# Altium PCB BBiQ_PCB.PcbDoc (part 2 of 2)
Units mil, origin at the board's own origin, x right, y up, seen from the top; angles counter-clockwise.
Board outline 2950 x 4745 mil, 2 copper layers (Top Layer, Bottom Layer); 173 components, 113 nets, 521 pads, 256 vias.
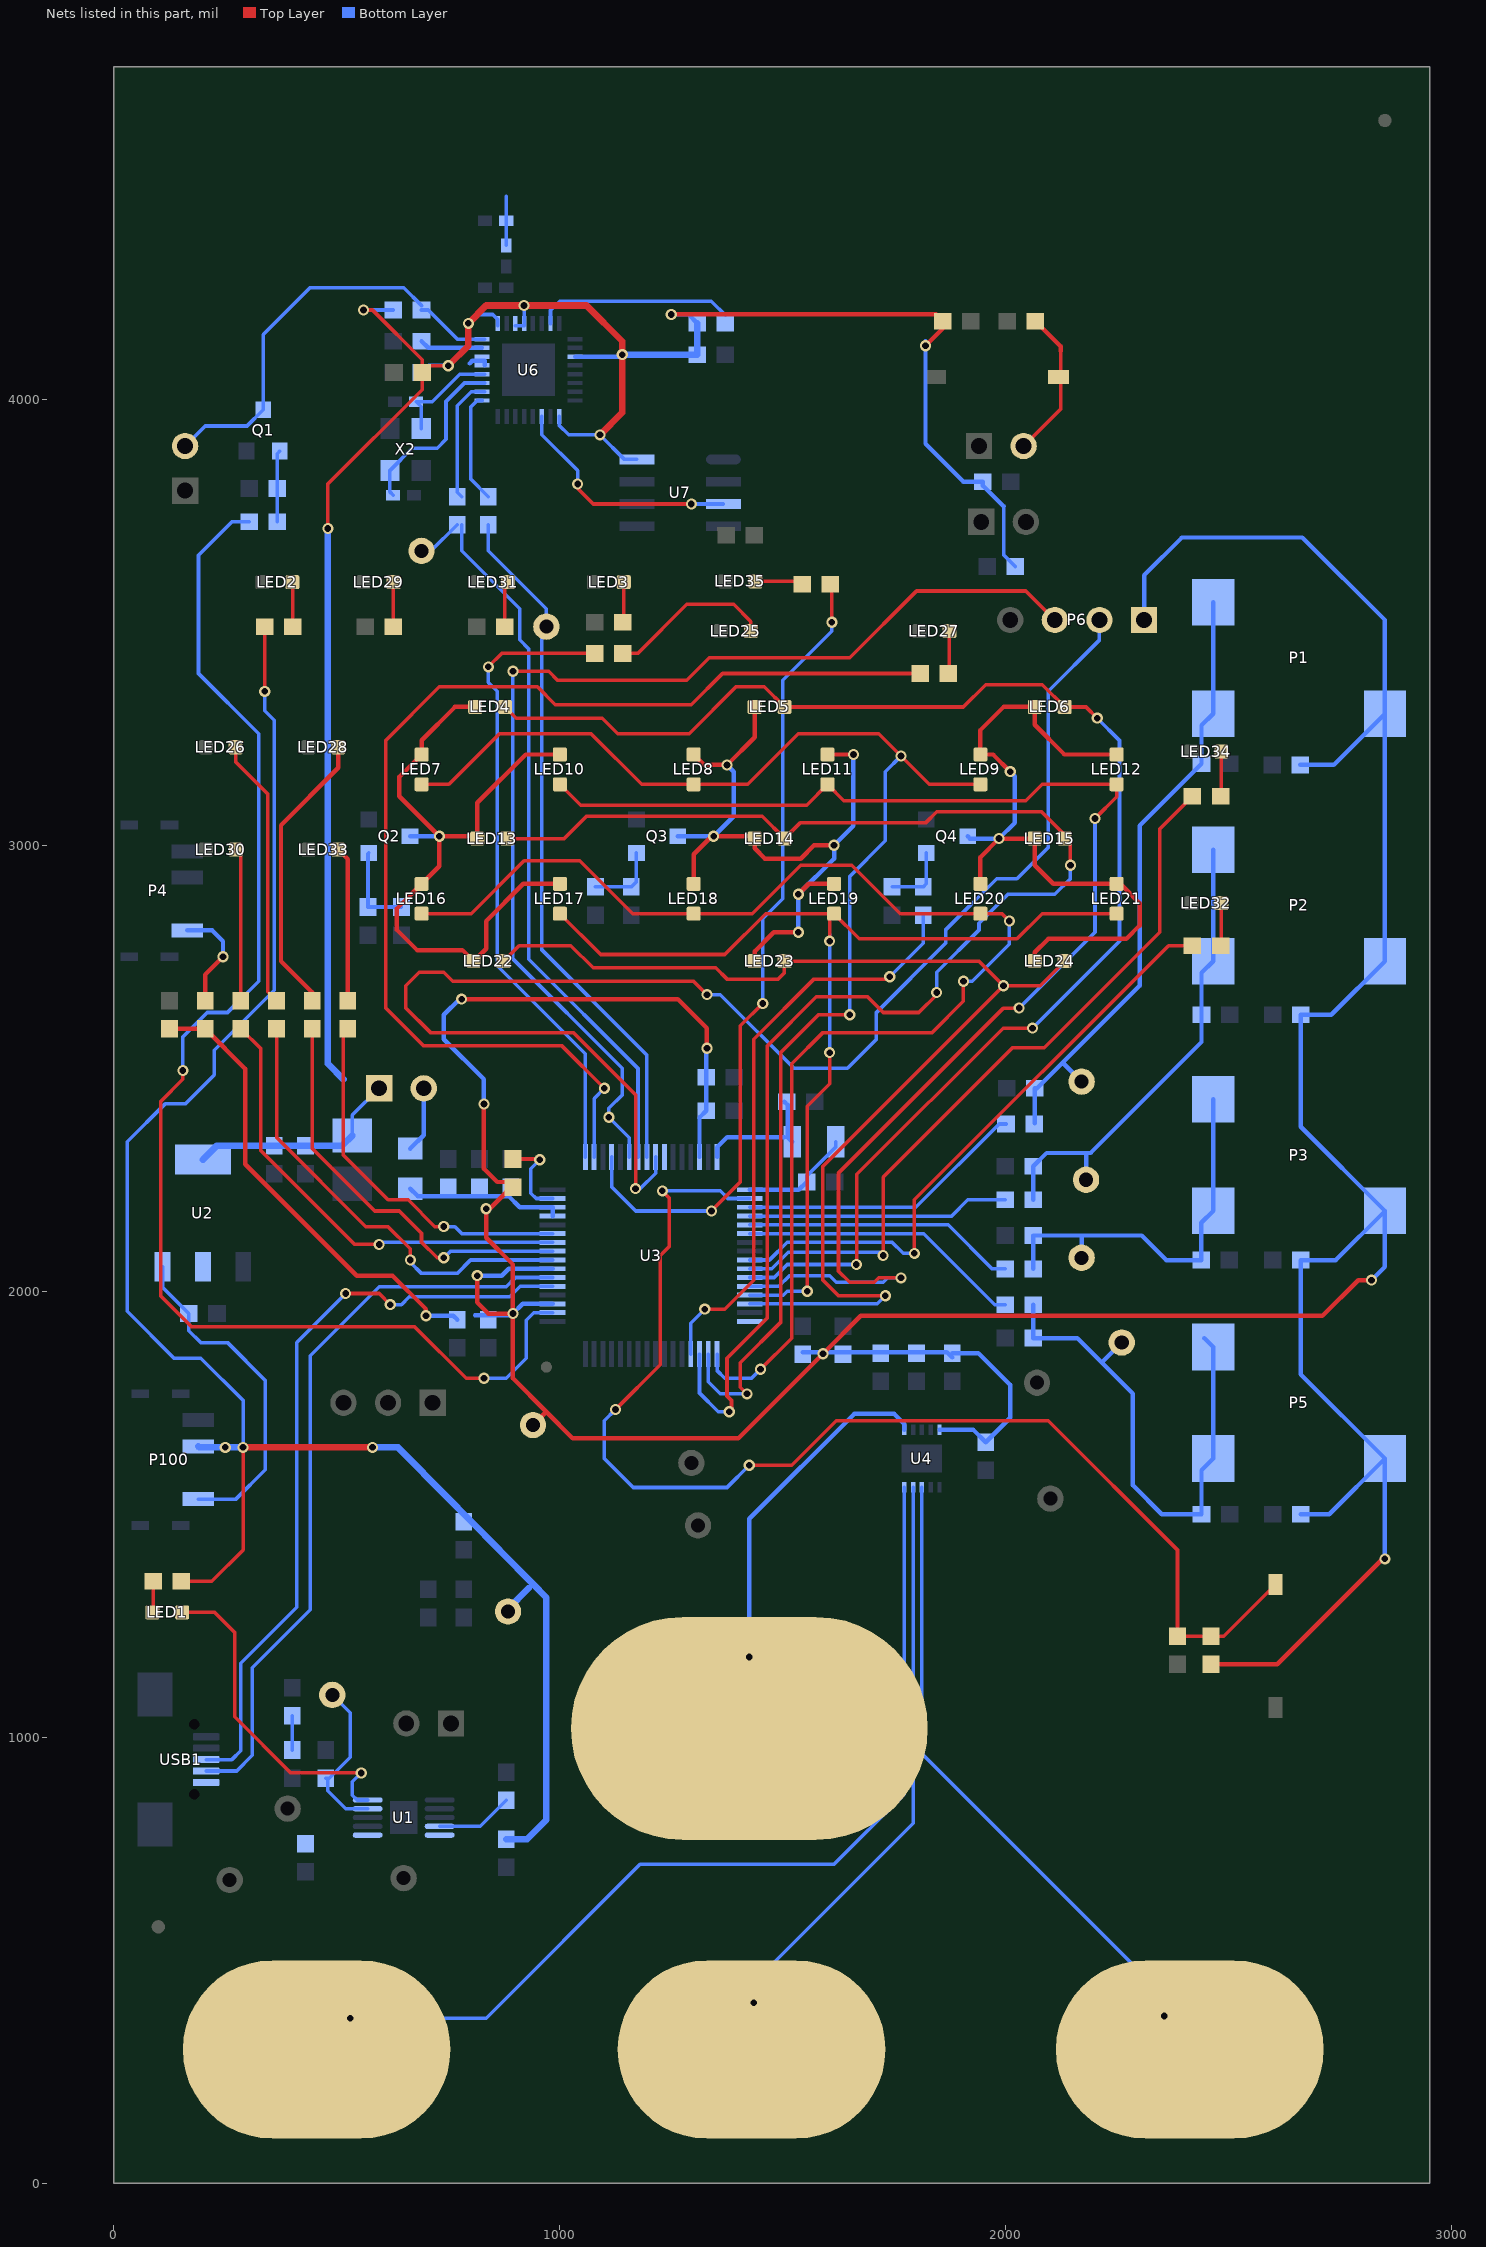
[diagram p2: the nets of this part, all layers, seen from the top]

## Via types
v1: diameter 25, hole 15, Top Layer to Bottom Layer, 244 vias
v2: diameter 23.62, hole 21.65, Top Layer to Bottom Layer, 8 vias
v3: diameter 35.43, hole 35.43, Top Layer to Bottom Layer, 4 vias

## Nets (pads, with @x,y where several pads share a name; then routed paths per layer and width w, separated by ;. In a path a pad name is that pad's centre, name@x,y a point inside that pad or via, vN(x,y) a via of type N, cw(c..) or ccw(c..) an arc to the next point about the centre after c; other vN are vias at no path point) (continued)
LED_CTRL_3: R34.1 U3.52 | length 1323.5
  Top Layer w8: v1(1325,1960) 1370,1960 1435,2025 1435,2565 1570,2700 1735,2700 v1(1740,2705)
  Bottom Layer w8: U3.52@1293.58,1859 1293.58,1928.58 v1(1325,1960) ; v1(1740,2705) 1815,2780 R34.1@1815,2843.5
LED_DEG: R45.2 U3.41 | length 1375.5
  Top Layer w8: v1(1795,2085) 1795,2205 2365,2775 R45.2@2418.5,2775
  Bottom Layer w8: U3.41@1426,2070.16 1470.16,2070.16 1510,2110 1745,2110 1770,2085 v1(1795,2085)
LED_DONE: R48.2 U3.20 | length 1831.5
  Top Layer w8: v1(1340,2180) 1405,2245 1405,2595 v1(1455,2645) ; R48.2@1606.5,3585 1610,3581.5 v1(1610,3500)
  Bottom Layer w8: U3.20@1116.42,2301 1116.42,2233.58 1170,2180 v1(1340,2180) ; v1(1455,2645) 1455,2835 1500,2880 1500,3370 1610,3480 v1(1610,3500)
LED_FAHR: R47.2 U3.42 | length 1676.3
  Top Layer w8: v1(1725,2080) 1725,2256 2015,2546 2086,2546 2345,2805 2345,3036.5 R47.2@2418.5,3110
  Bottom Layer w8: U3.42@1426,2050.47 1475.47,2050.47 1512.5,2087.5 1717.5,2087.5 v1(1725,2080)
LED_PROBE_1: R39.2 U3.8 | length 1018.9
  Top Layer w8: R39.2@365,2588.5 365,2345 565,2145 615,2145 665,2095 v1(665,2070)
  Bottom Layer w8: v1(665,2070) 665,2065 690,2040 769.84,2040 800,2070.16 U3.8@984,2070.16
LED_PROBE_2: R41.2 U3.9 | length 926.9
  Top Layer w8: R41.2@445,2588.5 445,2320 585,2180 640,2180 690,2130 690,2110 725,2075 v1(740,2075)
  Bottom Layer w8: v1(740,2075) 754.84,2089.84 U3.9@984,2089.84
LED_PROBE_3: R43.2 U3.10 | length 1035
  Top Layer w8: R43.2@285,2588.5 330,2543.5 330,2315 540,2105 v1(595,2105)
  Bottom Layer w8: v1(595,2105) 599.53,2109.53 U3.10@984,2109.53
LED_PROBE_4: R46.2 U3.11 | length 829.5
  Top Layer w8: R46.2@525,2588.5 515,2578.5 515,2305 615,2205 660,2205 720,2145 v1(740,2145)
  Bottom Layer w8: v1(740,2145) 765,2145 780.79,2129.21 U3.11@984,2129.21
LED_SEG_1: LED4.1 LED5.1 LED6.1 U3.43 | length 3246.4
  Top Layer w8: LED4.1@877.24,3310 902.24,3285 1095,3285 1130,3250 1290,3250 1395,3355 1458.78,3355 LED5.1@1503.78,3310 1905,3310 1955,3360 2081.93,3360 LED6.1@2131.93,3310 2180,3310 v1(2205,3285) ; v1(1665,2060) 1666,2061 1666,2262 1994,2590 v1(2060,2590)
  Bottom Layer w8: U3.43@1426,2030.79 1480.79,2030.79 1510,2060 v1(1665,2060) ; v1(2060,2590) 2255,2785 2255,3235 v1(2205,3285)
LED_SEG_2: LED10.1 LED11.1 LED12.1 U3.44 | length 3201
  Top Layer w8: LED10.1@1000.32,3136.54 1046.85,3090 1553.78,3090 LED11.1@1600.32,3136.54 1636.85,3100 2045,3100 2081.54,3136.54 LED12.1@2248.46,3136.54 2248.46,3108.46 v1(2200,3060) ; v1(1765,2030) 1715,2030 1705,2020 1650,2020 1625,2045 1625,2265 1995,2635 v1(2030,2635)
  Bottom Layer w8: U3.44@1426,2011.1 1491.1,2011.1 1515,2035 1605,2035 1620,2020 1725,2020 1735,2030 v1(1765,2030) ; v1(2030,2635) 2200,2805 v1(2200,3060)
LED_SEG_3: LED17.1 LED19.1 LED21.1 U3.45 | length 2389.8
  Top Layer w8: LED17.1@1000.32,2846.54 1091.85,2755 1370,2755 1461.54,2846.54 LED19.1@1615,2846.54 ; v1(1555,2000) 1555,2415 1605,2465 v1(1605,2535) ; v1(1605,2785) 1605,2836.54 LED19.1@1615,2846.54 ; LED21.1@2248.46,2846.54 2081.54,2846.54 2025,2790 1671.54,2790 LED19.1@1615,2846.54
  Bottom Layer w8: U3.45@1426,1991.42 1501.42,1991.42 1510,2000 v1(1555,2000) ; v1(1605,2535) v1(1605,2785) 1605,2800
LED_SEG_4: LED22.1 LED23.1 LED24.1 U3.46 | length 2675
  Top Layer w8: LED22.1@873.78,2740 908.78,2775 1025,2775 1075,2725 1350,2725 1375,2700 1490,2700 1503.78,2713.78 LED23.1@1503.78,2740 1940,2740 v1(1995,2685) ; v1(1730,1990) 1625,1990 1590,2025 1590,2280 v1(1995,2685) ; LED24.1@2131.93,2740 2076.93,2685 v1(1995,2685)
  Bottom Layer w8: U3.46@1426,1971.73 1711.73,1971.73 v1(1730,1990)
LED_SEG_5: LED16.1 LED18.1 LED20.1 U3.49 | length 3053.5
  Top Layer w8: LED16.1@690.32,2846.54 801.54,2846.54 920,2965 1045,2965 1163.46,2846.54 LED18.1@1300.32,2846.54 1431.54,2846.54 1540,2955 1655,2955 1763.46,2846.54 LED20.1@1943.15,2846.54 1991.54,2846.54 v1(2008.07,2830) ; v1(1450,1825) 1520,1895 1520,2510 1590,2580 1835,2580 1905,2650 v1(1905,2695)
  Bottom Layer w8: U3.49@1352.64,1859 1352.64,1822.36 1370,1805 1430,1805 v1(1450,1825) ; v1(1905,2695) 1925,2695 2008.07,2778.07 v1(2008.07,2830)
LED_SEG_6: LED7.1 LED8.1 LED9.1 U3.50 | length 3227.4
  Top Layer w8: LED7.1@690.32,3136.54 751.54,3136.54 865,3250 1070,3250 1183.46,3136.54 LED8.1@1300.32,3136.54 1421.54,3136.54 1535,3250 1715,3250 1828.46,3136.54 LED9.1@1943.15,3136.54 ; v1(1420,1770) 1405,1785 1405,1840 1495,1930 1495,2535 1580,2620 v1(1650,2620)
  Bottom Layer w8: U3.50@1332.95,1859 1332.95,1797.05 1360,1770 v1(1420,1770) ; v1(1650,2620) 1650,2930 1730,3010 1730,3165 v1(1765,3200)
LED_SEG_7: LED13.1 LED14.1 LED15.1 U3.51 | length 3373.4
  Top Layer w8: LED13.1@881.93,3015 1010,3015 1060,3065 1453.78,3065 LED14.1@1503.78,3015 1538.78,3050 1820,3050 1845,3075 2080,3075 2131.93,3023.07 LED15.1@2131.93,3015 2145,3001.93 v1(2145,2955) ; v1(1380,1730) 1385,1735 1385,1755 1375,1765 1375,1850 1465,1940 1465,2550 1575,2660 1690,2660 1725,2625 1805,2625 v1@1845,2665
  Bottom Layer w8: U3.51@1313.27,1859 1313.27,1771.73 1355,1730 v1(1380,1730) ; v1(1845,2670) 1845,2715 1940,2810 1940,2825 2005,2890 2110,2890 2145,2925 v1(2145,2955)
LED_TEMP_CURR: R38.2 U3.17 | length 1440
  Top Layer w8: v1(840,3400) 870,3430 R38.2@1078.5,3430
  Bottom Layer w8: v1(840,3400) 840,3365 860,3345 860,2730 1057.36,2532.64 U3.17@1057.36,2301
LED_TEMP_TAGT: R40.2 U3.18 | length 2621.8
  Top Layer w8: v1(1100,2455) 1005,2550 695,2550 610,2635 610,3235 730,3355 950,3355 990,3315 1295,3315 1365,3385 R40.2@1808.5,3385
  Bottom Layer w8: U3.18@1077.05,2301 1077.05,2432.05 v1(1100,2455)
MINUS: K1.1 U4.10 | length 2139.1
  Bottom Layer w8: v1(530,370) 835,370 1180,715 1615,715 1772.64,872.64 U4.10@1772.64,1560.94
MUX: K2.1 U4.1 | length 777.7
  Bottom Layer w10: v1(1425,1180) 1425,1490 1660,1725 1750,1725 1772.64,1702.36 U4.1@1772.64,1689.06
NetC6_1: C6.1 P100.1 U2.3 | length 763.5
  Bottom Layer w8: U2.3@109.45,2054.92 109.45,2009.06 C6.1@168.5,1950 168.5,1911.5 195,1885 255,1885 340,1800 340,1600 274.06,1534.06 P100.1@189.37,1534.06
NetC10_1: C10.1 J8.0 P1.2 P1.3 R9.1 R10.2 | length 1393.7
  Bottom Layer w10: R9.1@2065,2376.5 C10.1@2065,2455 2070,2455 2300,2685 2300,3043.9 R10.2@2438.84,3182.73 2438.84,3268.84 P1.2@2465,3295 P1.3@2465,3545 ; 2130,2510 J8.0@2170,2470
NetC21_2: C21.2 U3.15 | length 202.9
  Top Layer w8: C21.2@890,2296.5 953.5,2296.5 v1(955,2295)
  Bottom Layer w8: v1(955,2295) 935,2275 935,2220 947.05,2207.95 U3.15@984,2207.95
NetC22_1: C22.1 J10.0 P2.2 P2.3 R11.1 R12.2 | length 1069.8
  Bottom Layer w10: R11.1@2061.5,2205 C22.1@2061.5,2280 2091.5,2310 2180,2310 ; J10.0@2180,2250 2180,2310 ; P2.3@2465,2990 P2.2@2465,2740 2438.84,2713.84 R12.2@2438.84,2620 2438.84,2558.84 2190,2310 2180,2310
NetC25_1: C25.1 J11.0 P3.2 P3.3 R13.1 R15.2 | length 890.8
  Bottom Layer w10: R13.1@2061.5,2050 C25.1@2061.5,2125 2305,2125 2360,2070 R15.2@2438.5,2070 2438.5,2153.5 P3.2@2465,2180 P3.3@2465,2430 ; J11.0@2170,2075 2170,2120
NetC29_1: C29.1 J13.0 P5.2 P5.3 R16.1 R17.2 | length 1210.3
  Bottom Layer w10: R16.1@2061.5,1970 C29.1@2061.5,1895 2160,1895 2285,1770 2285,1565 2350,1500 R17.2@2438.84,1500 2438.84,1598.84 P5.2@2465,1625 P5.3@2465,1875 P5.3@2445,1895 ; 2217.5,1842.5 J13.0@2260,1885
NetC34_2: C34.2 L3.2 | length 110
  Bottom Layer w8: C34.2@880,4345 L3.2@880,4400 880,4455
NetC35_1: C35.1 J17.2 S2.1 | length 337.6
  Top Layer w8: J17.2@2040,3895 2122.8,3977.8 2122.8,4107.2
  Top Layer w10: C35.1@2066.5,4175 2122.8,4118.7 2122.8,4107.2
NetC36_1: C36.1 U6.27 X2.3 | length 401.6
  Bottom Layer w8: C36.1@626.38,3785 619.25,3792.13 X2.3@619.25,3840.35 668.9,3890 725,3890 745,3910 745,3995 786.42,4036.42 U6.27@831.57,4036.42
NetC37_1: C37.1 U6.28 X2.1 | length 243.9
  Bottom Layer w8: X2.1@689.37,3934.37 689.37,3982.99 C37.1@677.99,3994.37 714.37,3994.37 776.1,4056.1 U6.28@831.57,4056.1
NetJ3_0: J3.0 R4.2 U1.4 | length 363.8
  Bottom Layer w8: R4.2@475,908.5 483.5,908.5 530,955 530,1055 J3.0@490,1095 ; R4.2@480,907.01 480,880 520.32,839.68 U1.4@569.29,839.68
NetJ7_2: J7.2 L1.1 | length 147.4
  Bottom Layer w10: L1.1@665,2320 695,2350 J7.2@695,2455
NetJ20_2: J20.2 Q1.3 R25.1 U6.32 | length 961
  Bottom Layer w8: J20.2@160,3895 205,3940 298.74,3940 Q1.3@335,3976.26 335,4145 440,4250 650,4250 R25.1@690,4210 ; R25.1@690,4200 705,4200 770.16,4134.84 U6.32@825.67,4134.84 U6.32@831.57,4134.84
NetLED1_1: LED1.1 R1.1 | length 68
  Top Layer w8: LED1.1@88.5,1281.97 R1.1@88.5,1350
NetLED2_1: LED2.1 R2.1 | length 107.7
  Top Layer w8: LED2.1@395,3584.37 LED2.1@400.32,3589.69 401.5,3588.5 R2.1@401.5,3490
NetLED3_1: LED3.1 R30.1 | length 90.8
  Top Layer w8: R30.1@1141.5,3500 1143.46,3501.97 LED3.1@1143.46,3590
NetLED4_2: LED4.2 LED7.2 LED10.2 LED13.2 LED16.2 LED17.2 LED22.2 Q2.3 | length 1631.6
  Top Layer w10: LED13.2@810,3020 v1(730,3020) ; LED4.2@810.32,3310 765,3310 690.32,3235.31 LED7.2@690.32,3203.46 640,3153.15 640,3110 v1(730,3020) ; LED13.2@815,3015 815,3095 923.46,3203.46 LED10.2@1000.32,3203.46 ; LED17.2@1000.32,2913.46 918.46,2913.46 835,2830 835,2768.15 LED22.2@806.85,2740 781.85,2765 680,2765 635,2810 635,2858.15 LED16.2@690.32,2913.46 730,2953.15 v1(730,3020)
  Bottom Layer w10: Q2.3@664.72,3020 v1(730,3020)
NetLED5_2: LED5.2 LED8.2 LED11.2 LED14.2 LED18.2 LED19.2 LED23.2 Q3.3 | length 1684.5
  Top Layer w10: LED18.2@1300.32,2913.46 1300.32,2979.69 1340.63,3020 v1(1345,3020) 1431.85,3020 LED14.2@1436.85,3015 1436.85,2993.15 1460,2970 1540,2970 1570,3000 v1(1615,3000) ; LED8.2@1300.32,3203.46 1323.78,3180 v1(1375,3180) 1436.85,3241.85 LED5.2@1436.85,3310 ; LED23.2@1436.85,2740 1436.85,2761.85 1480,2805 v1(1535,2805) ; v1(1535,2890) 1558.46,2913.46 LED19.2@1615,2913.46 ; LED11.2@1600.32,3203.46 v1(1658.46,3203.46)
  Bottom Layer w10: Q3.3@1264.41,3020.32 1344.68,3020.32 v1(1345,3020) 1390,3065 1390,3165 v1(1375,3180) ; v1(1535,2805) v1(1535,2890) 1615,2970 v1(1615,3000) 1658.46,3043.46 v1(1658.46,3203.46)
NetLED6_2: LED6.2 LED9.2 LED12.2 LED15.2 LED20.2 LED21.2 LED24.2 Q4.3 | length 1632.2
  Top Layer w10: LED20.2@1943.15,2913.46 1943.15,2973.15 v1(1985,3015) LED15.2@2065,3015 2065,2955 2106.54,2913.46 LED21.2@2248.46,2913.46 2256.54,2913.46 2300,2870 2300,2820 2270,2790 2095,2790 2065,2760 LED24.2@2065,2740 ; v1(2010,3165) 1971.54,3203.46 LED9.2@1943.15,3203.46 1943.15,3258.15 1995,3310 LED6.2@2065,3310 2065,3270 2131.54,3203.46 LED12.2@2248.46,3203.46
  Bottom Layer w10: Q4.3@1914.41,3020.32 1919.72,3015 v1(1985,3015) 2020,3050 2020,3155 v1(2010,3165)
NetLED25_1: LED25.1 R38.1 | length 370
  Top Layer w8: R38.1@1141.5,3430 1175,3430 1285,3540 1390,3540 1428.46,3501.54 LED25.1@1428.46,3480
NetLED26_1: LED26.1 R39.1 | length 606.1
  Top Layer w8: LED26.1@273.46,3219.69 273.46,3186.54 345,3115 345,2671.5 R39.1@365,2651.5
NetLED27_1: LED27.1 R40.1 | length 93
  Top Layer w8: R40.1@1873.46,3386.97 LED27.1@1873.46,3480
NetLED28_1: LED28.1 R41.1 | length 650.4
  Top Layer w10: R41.1@445,2651.5 445,2670 375,2740 375,3045 503.46,3173.46 LED28.1@503.46,3219.69
NetLED29_1: LED29.1 R42.1 | length 100
  Top Layer w8: R42.1@626.5,3490 626.5,3588.94 LED29.1@627.24,3589.69
NetLED30_1: LED30.1 R43.1 | length 343.2
  Top Layer w8: LED30.1@273.78,2990 285,2978.78 R43.1@285,2651.5
NetLED31_1: LED31.1 R44.1 | length 92.4
  Top Layer w8: R44.1@876.5,3490 LED31.1@876.5,3582.4
NetLED32_1: LED32.1 R45.1 | length 93
  Top Layer w8: R45.1@2483.46,2776.97 LED32.1@2483.46,2870
NetLED33_1: LED33.1 R46.1 | length 347.3
  Top Layer w10: LED33.1@503.78,2990 525,2968.78 R46.1@525,2651.5
NetLED34_1: LED34.1 R47.1 | length 98
  Top Layer w8: R47.1@2483.46,3111.97 LED34.1@2483.46,3210
NetLED35_1: LED35.1 R48.1 | length 107.7
  Top Layer w8: LED35.1@1438.46,3591.5 1537,3591.5 R48.1@1543.5,3585
NetP4_1: P4.1 R14.2 | length 240.7
  Top Layer w10: R14.2@205,2651.5 205,2710 v1(245,2750)
  Bottom Layer w10: P4.1@164.37,2809.06 220.94,2809.06 245,2785 v1(245,2750)
NetQ1_1: Q1.1 R22.2 R23.2 | length 161.2
  Bottom Layer w8: R22.2@366.5,3725 R23.2@366.5,3800 366.5,3877.83 Q1.1@372.4,3883.74
NetQ2_1: Q2.1 R32.2 R35.2 | length 197.2
  Bottom Layer w8: Q2.1@571.89,2982.91 570,2981.02 R35.2@570,2861.5 R32.2@645,2861.5
NetQ3_1: Q3.1 R33.2 R36.2 | length 161.3
  Bottom Layer w8: R36.2@1080,2906.5 R33.2@1160,2906.5 1171.89,2918.39 Q3.1@1171.89,2982.91
NetQ4_1: Q4.1 R34.2 R37.2 | length 149.3
  Bottom Layer w8: R37.2@1745,2906.5 R34.2@1815,2906.5 1821.89,2913.39 Q4.1@1821.89,2982.91
NetR3_1: R3.1 R6.2 | length 77
  Bottom Layer w8: R3.1@400,971.5 R6.2@400,1048.5
NetR5_2: R5.2 U1.9 | length 173.4
  Bottom Layer w8: U1.9@730.71,800.31 821.81,800.31 R5.2@880,858.5
NetR26_1: R26.1 U6.7 | length 443.9
  Bottom Layer w8: U6.7@979.21,4169.29 979.21,4199.21 1000,4220 1340,4220 R26.1@1371.5,4188.5
NetR27_2: R27.2 U6.25 | length 249
  Bottom Layer w8: U6.25@825.67,3997.05 815.05,3997.05 800,3982 800,3821.5 R27.2@840,3781.5
NetR28_2: R28.2 U6.26 | length 282.4
  Bottom Layer w8: R28.2@780,3781.5 770,3791.5 770,3985 801.73,4016.73 U6.26@831.57,4016.73
NetR31_2: R31.2 U6.31 | length 141.8
  Bottom Layer w10: R31.2@690,4130 704.84,4115.16 U6.31@825.67,4115.16
NMI_B: U3.26
PG_N: LED1.2 U1.5 | length 758.3
  Top Layer w8: LED1.2@153.46,1280 226,1280 271,1235 271,1046 397,920 v1(555,920)
  Bottom Layer w8: v1(555,920) 535,900 535,870 545.63,859.37 U1.5@569.29,859.37
PLUS: K4.1 U4.8 | length 1410.9
  Bottom Layer w8: U4.8@1812.01,1560.94 1812.01,962.99 2355,420 v1(2355,375)
PROBE_1: R9.2 U3.35 | length 651.9
  Bottom Layer w8: U3.35@1426,2188.27 1798.27,2188.27 1985,2375 R9.2@2000.51,2375
PROBE_2: R11.2 U3.36 | length 587.6
  Bottom Layer w8: U3.36@1426,2168.58 1878.58,2168.58 1915,2205 R11.2@1998.5,2205
PROBE_3: R13.2 U3.37 | length 613.5
  Bottom Layer w8: U3.37@1426,2148.9 1871.1,2148.9 1970,2050 R13.2@1998.5,2050
PROBE_4: R16.2 U3.38 | length 638.5
  Bottom Layer w8: U3.38@1426,2129.21 1815.79,2129.21 1975,1970 R16.2@1998.5,1970
RESET_ESP: R22.1 U3.2 | length 3044.3
  Top Layer w8: v1(155,2495) 155,2475 105,2425 105,1990 175,1920 675,1920 790,1805 v1(830,1805)
  Bottom Layer w8: v1(155,2495) 155,2570 210,2625 255,2625 325,2695 325,3250 190,3385 190,3650 265,3725 R22.1@303.5,3725 ; v1(830,1805) 880,1805 925,1850 925,1935 942.05,1952.05 U3.2@984,1952.05
RESET_KL27: C31.1 R21.2 S1.1 U3.34 | length 2825.2
  Top Layer w8: v1(1125,1735) 1225,1835 1225,2080 1245,2100 1245,2210 v1(1230,2225) ; v1(1425,1610) 1520,1610 1620,1710 2095,1710 2385,1420 C31.1@2385,1226.5 2488.7,1226.5 S1.1@2605,1342.8
  Bottom Layer w8: v1(1125,1735) 1100,1710 1100,1625 1165,1560 1375,1560 v1(1425,1610) ; v1(1230,2225) 1360,2225 1377.05,2207.95 U3.34@1426,2207.95
SET: K3.1 U4.9 | length 1304
  Bottom Layer w8: v1(1435,405) 1435,450 1792.32,807.32 U4.9@1792.32,1560.94
SWD_CLK: P6.3 U3.22 | length 2554.9
  Top Layer w8: v1(895,3390) 975,3390 995,3370 1285,3370 1335,3420 1650,3420 1800,3570 2045,3570 P6.3@2110,3505
  Bottom Layer w8: v1(895,3390) 895,2745 1140,2500 1140,2440 1110,2410 v1(1110,2390) 1155.79,2344.21 U3.22@1155.79,2301
SWD_DIO: P6.2 U3.25 | length 3308.1
  Top Layer w8: v1(1170,2230) 1170,2440 1030,2580 710,2580 655,2635 655,2685 685,2715 740,2715 760,2695 1300,2695 v1(1330,2665)
  Bottom Layer w8: v1(1170,2230) 1180,2230 1214.84,2264.84 U3.25@1214.84,2301 ; v1(1330,2665) 1360,2665 1525,2500 1645,2500 1710,2565 1710,2625 1865,2780 1865,2810 1980,2925 2025,2925 2095,2995 2095,3345 2210,3460 P6.2@2210,3505
U0_RX_ESP8266: J18.0 R27.1 U3.24 | length 1572.9
  Bottom Layer w8: R27.1@840,3718.5 840,3660 970,3530 J18.0@970,3490 960,3480 960,2765 1195.16,2529.84 U3.24@1195.16,2301
U0_TX_ESP8266: J19.0 R28.1 U3.23 | length 1685.5
  Bottom Layer w8: J19.0@690,3660 711.5,3660 R28.1@770,3718.5 ; R28.1@780,3718.5 780,3660 910,3530 910,3460.47 930.47,3440 930.47,2744.53 1175.47,2499.53 U3.23@1175.47,2301
USB_D_N: U3.6 USB1.2 | length 1684
  Bottom Layer w8: USB1.2@207.09,924.41 275.6,924.41 310.59,959.4 310.59,1155.59 440.59,1285.59 440.59,1855.59 595,2010 880,2010 900.79,2030.79 U3.6@984,2030.79
USB_D_P: U3.5 USB1.3 | length 1699.9
  Top Layer w8: v1(520,1995) 595,1995 v1(620,1970)
  Bottom Layer w8: USB1.3@207.09,950 265,950 285,970 285,1166.19 410,1291.19 410,1885 v1(520,1995) ; v1(620,1970) 645,1970 662.5,1987.5 887.5,1987.5 911.1,2011.1 U3.5@984,2011.1
V_ESP: C3.1 C4.1 C7.1 C8.1 C32.1 C33.1 C38.1 J7.1 R24.2 R25.2 R26.2 R29.2 U2.2 U2.4 U6.1 U6.3 U6.4 U6.11 U6.17 U6.29 U6.30 U7.8 | length 5532.4
  Top Layer w8: v1(480,3710) 480,3810 691.5,4021.5 C4.1@691.5,4060 ; v1(560,4200) 580,4200 691.5,4088.5 C4.1@691.5,4060 ; v1(750,4075) 706.5,4075 C4.1@691.5,4060
  Top Layer w10: v1(1250,4190) 1843.5,4190 C38.1@1858.5,4175 1858.5,4158.5 v1(1820,4120)
  Top Layer w15: v1(750,4075) 795,4120 v1(795,4170) 835,4210 v1(920,4210) 1060,4210 1140,4130 v1(1140,4100) 1140,3970 v1(1090,3920)
  Bottom Layer w8: C3.1@535,2349.13 535,2395 J7.1@595,2455 ; v1(560,4200) R25.2@627.01,4200 ; C33.1@690,4060 705.79,4075.79 v1@750,4075.79 ; v1(795,4170) 815,4190 850,4190 861.1,4178.9 U6.1@861.1,4164.37 ; U6.3@900.47,4164.37 920.16,4164.37 920.16,4209.84 v1(920,4210) ; U6.17@998.9,3961.61 998.9,3941.1 1020,3920 v1(1090,3920) 1145,3865 U7.8@1173,3865 ; 1995,3760 1995,3651.5 R29.2@2021.5,3625
  Bottom Layer w10: 798,4080.1 803.9,4086 831.57,4086 U6.29@831.57,4075.79 ; U6.11@1034.33,4095.47 1135.47,4095.47 v1(1140,4100) ; v1(1250,4190) 1288.5,4190 R26.2@1308.5,4170 C32.1@1308.5,4100 ; v1@1820,4130 v1(1820,4120) 1820,3900 1905,3815 R24.2@1948.5,3815 1948.5,3806.5 1995,3760
  Bottom Layer w15: U2.4@200,2295.08 231.42,2326.5 C8.1@360,2326.5 512.36,2326.5 C3.1@535,2349.13 ; v1(480,3710) 480,2510 515,2475 ; v1(1140,4100) C32.1@1308.5,4100 R26.2@1308.5,4170
V_KL27: C9.1 C11.1 C12.1 C13.1 C14.1 C15.1 C16.1 C18.1 C20.1 C21.1 C23.1 C24.1 C26.1 C27.1 C28.1 C30.1 J9.0 L1.2 P1.1 P2.1 P3.1 P5.1 P6.1 R14.1 R18.1 R19.1 R20.1 R21.1 U3.3 U3.7 U3.13 U3.14 U3.30 U3.48 U4.5 | length 11114.9
  Top Layer w10: C24.1@125,2588.5 R14.1@205,2588.5 295,2498.5 295,2285 545,2035 625,2035 700,1960 v1(700,1945) ; v1(780,2655) 1265,2655 1330,2590 v1(1330,2545) ; v1(815,2035) 815,1975 840,1950 v1(895,1950) ; v1(830,2420) 830,2275 860,2245 883.5,2245 C21.1@895,2233.5 ; C21.1@891.5,2233.5 842.99,2185 v1(835,2185) 835,2120 895,2060 v1(895,1950) ; J9.0@935,1695 969.55,1729.55 1029.09,1670 1400,1670 v1(1590,1860) 1675,1945 2710,1945 2790,2025 v1(2820,2025) ; 970,1730 895,1805 v1(895,1950) ; R21.1@2460,1163.5 2608.5,1163.5 v1@2845,1400
  Bottom Layer w10: L1.2@665,2230 681.5,2213.5 885,2213.5 910.24,2188.27 U3.14@984,2188.27 U3.13@984,2168.58 ; v1(700,1945) 761.5,1945 C28.1@770,1936.5 ; v1(780,2655) 775,2655 740,2620 740,2565 830,2475 v1(830,2420) ; 810,1946.5 891.5,1946.5 v1(895,1950) 916.73,1971.73 U3.3@984,1971.73 ; v1(815,2035) 870,2035 885.47,2050.47 U3.7@984,2050.47 ; U3.30@1313.27,2301 1313.27,2389.76 C16.1@1328.5,2405 C15.1@1328.5,2480 1328.5,2543.5 v1(1330,2545) ; C11.1@1545,1863.5 1867.99,1863.5 R20.1@1880,1851.5 ; U4.5@1851.38,1689.06 1927.44,1689.06 C30.1@1955,1661.5 2010,1716.5 2010,1790 1938.5,1861.5 R20.1@1880,1861.5 ; P6.1@2310,3505 2310,3605 2395,3690 2665,3690 2850,3505 P1.1@2850,3295 ; C9.1@2660,3180 2735,3180 P1.1@2850,3295 ; C26.1@2661.5,1500 2725,1500 P5.1@2850,1625 ; v1(2820,2025) 2850,2055 P3.1@2850,2180 ; v1(2850,1400) P5.1@2850,1625 ; P5.1@2850,1625 2661.5,1813.5 C23.1@2661.5,2070 2740,2070 P3.1@2850,2180 ; P3.1@2850,2180 2661.5,2368.5 C20.1@2661.5,2620 2730,2620 P2.1@2850,2740 P1.1@2850,3295
V_USB: C1.1 U1.1 USB1.1@207.09,898.82
VBAT: C2.1 J1.0 P100.2 R1.2 R2.2 R7.2 U1.10 | length 4131.6
  Top Layer w8: R1.2@151.5,1350 220,1350 290,1420 v1(290,1650) ; v1(338.5,3345) 338.5,3470
  Top Layer w15: v1(290,1650) v1(580,1650)
  Bottom Layer w8: v1(290,1650) 290,1755 195,1850 135,1850 30,1955 30,2335 115,2420 160,2420 225,2485 225,2540 360,2675 360,3280 338.5,3301.5 v1(338.5,3345)
  Bottom Layer w15: P100.2@189.37,1652.17 191.54,1650 v1(290,1650) ; v1(580,1650) 637.58,1649.63 751.39,1534.36 793.66,1491.55 939.73,1343.61 970,1312.95 970,815 926.5,771.5 C2.1@880,771.5 ; J1.0@884,1282 884,1288 930,1334
  other v1: 250,1650
WP: U6.19 U7.3 | length 536.4
  Top Layer w8: v1(1040,3810) 1040,3800 1075,3765 v1(1295,3765)
  Bottom Layer w8: U6.19@959.53,3961.61 959.53,3920.47 1040,3840 v1(1040,3810) ; v1(1295,3765) U7.3@1367,3765
XTAL_1: C17.1 U3.32 X1.2 | length 278.9
  Bottom Layer w10: U3.32@1352.64,2301 1352.64,2322.64 1375,2345 X1.2@1503.5,2345 ; C17.1@1503.5,2425 1510.79,2417.72 1510.79,2345 X1.2@1520.79,2335
XTAL_2: C19.1 U3.33 X1.1 | length 251.9
  Bottom Layer w8: C19.1@1553.5,2245 1553.5,2258.5 1619.21,2324.21 X1.1@1619.21,2335
  Bottom Layer w10: U3.33@1426,2227.64 1536.14,2227.64 C19.1@1553.5,2245
pads on no net: LED1.0 LED2.0 LED3.0 LED4.0 LED5.0 LED6.0 LED7.0 LED8.0 LED9.0 LED10.0 LED11.0 LED12.0 LED13.0 LED14.0 LED15.0 LED16.0 LED17.0 LED18.0 LED19.0 LED20.0 LED21.0 LED22.0 LED23.0 LED24.0 LED25.0 LED26.0 LED27.0 LED28.0 LED29.0 LED30.0 LED31.0 LED32.0 LED33.0 LED34.0 LED35.0 P4.4 P4.5 P4.6 P4.7 P100.3 P100.4 P100.5 P100.6 P100.7 U1.6 U3.21 U3.58 U3.59 U3.60 U3.61 U3.62 U4.6 U4.7 U6.5 U6.6 U6.34 U6.35 U6.36 U6.37 U6.38 U6.39 U6.40 USB1.0 USB1.1@180.09,1029 USB1.4 USB1.SH
copper on no net:
  other v2: 2560,1750 2795,1750 2560,2305 2795,2305 2560,2865 2795,2865 2560,3420 2795,3420
  other v3: 114.37,1559.06 114.37,1681.69 89.37,2834.06 89.37,2956.69

## Polygon pours and split planes (outlines as drawn)
GND on Bottom Layer "BOT_MCU" (solid, pour order 0): 0,3700 2940,3700 2940,1380 2370,1380 0,1380
GND on Bottom Layer "BOT_CHARGE" (hatched 45Degree grid 80 track 8, pour order 8): 1040,1360 1040,620 0,620 0,0 1620,0 2940,0 2940,250 2940,1360
GND on Bottom Layer "BOT_CHARGE" (solid, pour order 6): -5,1382 1015,1382 1015,639 -5,639
GND on Bottom Layer "BOT_WIFI" (solid, pour order 12): 0,4440 2940,4440 2940,3695.38 0,3695.38
GND on Top Layer "TOP_MCU" (solid, pour order 2): 0,3700 2940,3700 2940,1380 0,1380
GND on Top Layer "TOP_WIFI" (solid, pour order 10): 0,4440 2940,4440 2940,3690 0,3690

## Keep-outs
Top Layer:
  circle w1: c100,575 r30
  circle w1: c2850,4625 r30

## Other copper
Top Layer:
  pour cut-out: 130.26,575 129.23,582.83 126.21,590.13 121.4,596.4 115.13,601.21 107.83,604.23 100,605.26 92.17,604.23 84.87,601.21 78.6,596.4 73.79,590.13 70.77,582.83 69.74,575 70.77,567.17 73.79,559.87 78.6,553.6 84.87,548.79 92.17,545.77 100,544.74 107.83,545.77 115.13,548.79 121.4,553.6 126.21,559.87 129.23,567.17 130.26,575
  pour cut-out: 2880.26,4625 2879.23,4632.83 2876.21,4640.13 2871.4,4646.4 2865.13,4651.21 2857.83,4654.23 2850,4655.26 2842.17,4654.23 2834.87,4651.21 2828.6,4646.4 2823.79,4640.13 2820.77,4632.83 2819.74,4625 2820.77,4617.17 2823.79,4609.87 2828.6,4603.6 2834.87,4598.79 2842.17,4595.77 2850,4594.74 2857.83,4595.77 2865.13,4598.79 2871.4,4603.6 2876.21,4609.87 2879.23,4617.17 2880.26,4625
  region net VBAT: 590,1670 600,1660 600,1640 590,1630 150,1630 150,1670
Bottom Layer:
  region: 891.5,4525.87 873.39,4525.87 873.39,4445.95 891.5,4445.95
  region: 942.51,4569.87 929.71,4582.68 873.19,4526.17 886,4513.36
  region: 947.51,4574.87 934.71,4587.68 878.19,4531.17 891,4518.36
  region: 891.5,4518.87 873.39,4518.87 873.39,4438.95 891.5,4438.95
  region net GND: 1310,4518.87 909.21,4518.87 909.21,4468.09 1310,4468.09
  region: 1310,4663.36 948.58,4663.36 948.58,4623.99 1310,4623.99
  region: 1310,4711 302.91,4711 302.91,4663.36 1310,4663.36
  region net GND: 1310,4663.36 1224.17,4663.36 1224.17,4468.09 1310,4468.09
  region net GND: 956.46,4468.09 909.21,4468.09 909.21,4438.36 956.46,4438.36
  region net GND: 1043.07,4468.09 989.21,4468.09 989.21,4438.95 1043.07,4438.95
  region: 995.83,4623.99 948.58,4623.99 948.58,4592.5 995.83,4592.5
  region: 1035.2,4592.5 909.21,4592.5 909.21,4544.86 1035.2,4544.86
  region net V_ESP: 809,4100 843,4100 845,4098 845,4073 843,4071 770,4071 760,4061 742,4061 735,4068 735,4081 745,4091 800,4091
  region net NetC34_2: 873.39,4440.59 891.5,4440.59 891.5,4394.5 891,4394 891,4359 873,4359 873.39,4359.39
  region net V_KL27: 1395,1935 1398,1938 1464,1938 1517,1885 1655,1885 1655,1840 1525,1840 1440,1925 1398,1925 1395,1928
  region net V_KL27: 755,1965 898.5,1965 910.5,1977 1015,1977 1015,1967 932,1967 885,1920 755,1920 750,1925 750,1960
  region net NetJ7_2: 665,2480 680,2495 715,2495 725,2485 725,2370 650,2295 640,2295 630,2305 630,2385 665,2420
  region net V_ESP: 490,2475 520,2505 625,2505 635,2495 635,2425 580,2370 580,2310 490,2310
  region net V_KL27: 635,2250 640,2255 730,2255 880,2255 940,2195 1015,2195 1015,2165 820,2165 790,2195 645,2195 635,2205
  region net V_USB: 182,907 253,907 375,785 465,785 600,785 605,780 605,763 582,740 380,740 235,885 193,885 182,896
  region net VBAT: 697,783 701,787 845,787 848,790 911,790 911,750 705,750 697,758
  region net V_ESP: 180,2025 185,2020 215,2020 220,2025 220,2155 270,2205 270,2325 260,2335 140,2335 130,2325 130,2205 180,2155
  region net GND: 954.37,2257 955,2256.37 955,2225 1035,2225 1036.86,2226.86 1036.86,2257
  region net GND: 620,790 620,760 580,720 300,720 290,710 290,640 970,640 970,730 700,730 680,750 680,790
  region net VBAT: 911,790 920,790 950,820 950,1310 630,1630 560,1630 550,1640 550,1660 560,1670 640,1670 990,1320 990,790 950,750 911,750
  region net GND: 620,850 620,870 610,880 570,880 570,900 580,910 580,930 560,950 560,1030 579,1030 680,929 680,870 680,850
  region net VBAT: 150,1670 310,1670 320,1660 320,1640 310,1630 150,1630
  region net V_ESP: 904,4153 904,4217 911,4224 926,4224 934,4216 934,4203 925,4194 925,4153

## Silkscreen, mask and mechanical layers (free items; w line width, h text height)
Top Overlay:
  lines w8: 0,0 0,4750 2950,4750 2950,0 0,0
  lines w10: 2190,4135 2905,4135 2910,4130 ; 2580,3940 2580,4320 ; 2190,3940 2190,4320 2910,4320 2910,3940 2255,3940 2190,3940
  text "TEST" at 2215,4195 h120
  text "MM/YY" at 2210,3995 h120
  text "MUX" at 1210,960 h240
  text "V1.0" at 2235,750 h180
  text "-" at 395,250 h240
  text "+" at 2380,225 h240
  text "SET" at 1245,220 h240
Mechanical 1:
  lines w8: 0,0 0,4750 2950,4750 2950,0 0,0

## Text inside footprints (layer, text, board x,y; h text height)
U3: Bottom Overlay "*" at 930,1907.52 h40 r180
U7: Bottom Overlay "*" at 1400,3895 h40